# Altium PCB foot_right.PcbDoc
Units mm, origin at the board's own origin, x right, y up, seen from the top; angles counter-clockwise.
Board outline 100 x 65 mm, 2 copper layers (Top Layer, Bottom Layer); 54 components, 39 nets, 212 pads, 0 vias.
Unrouted connection lines stored in the file: 136.
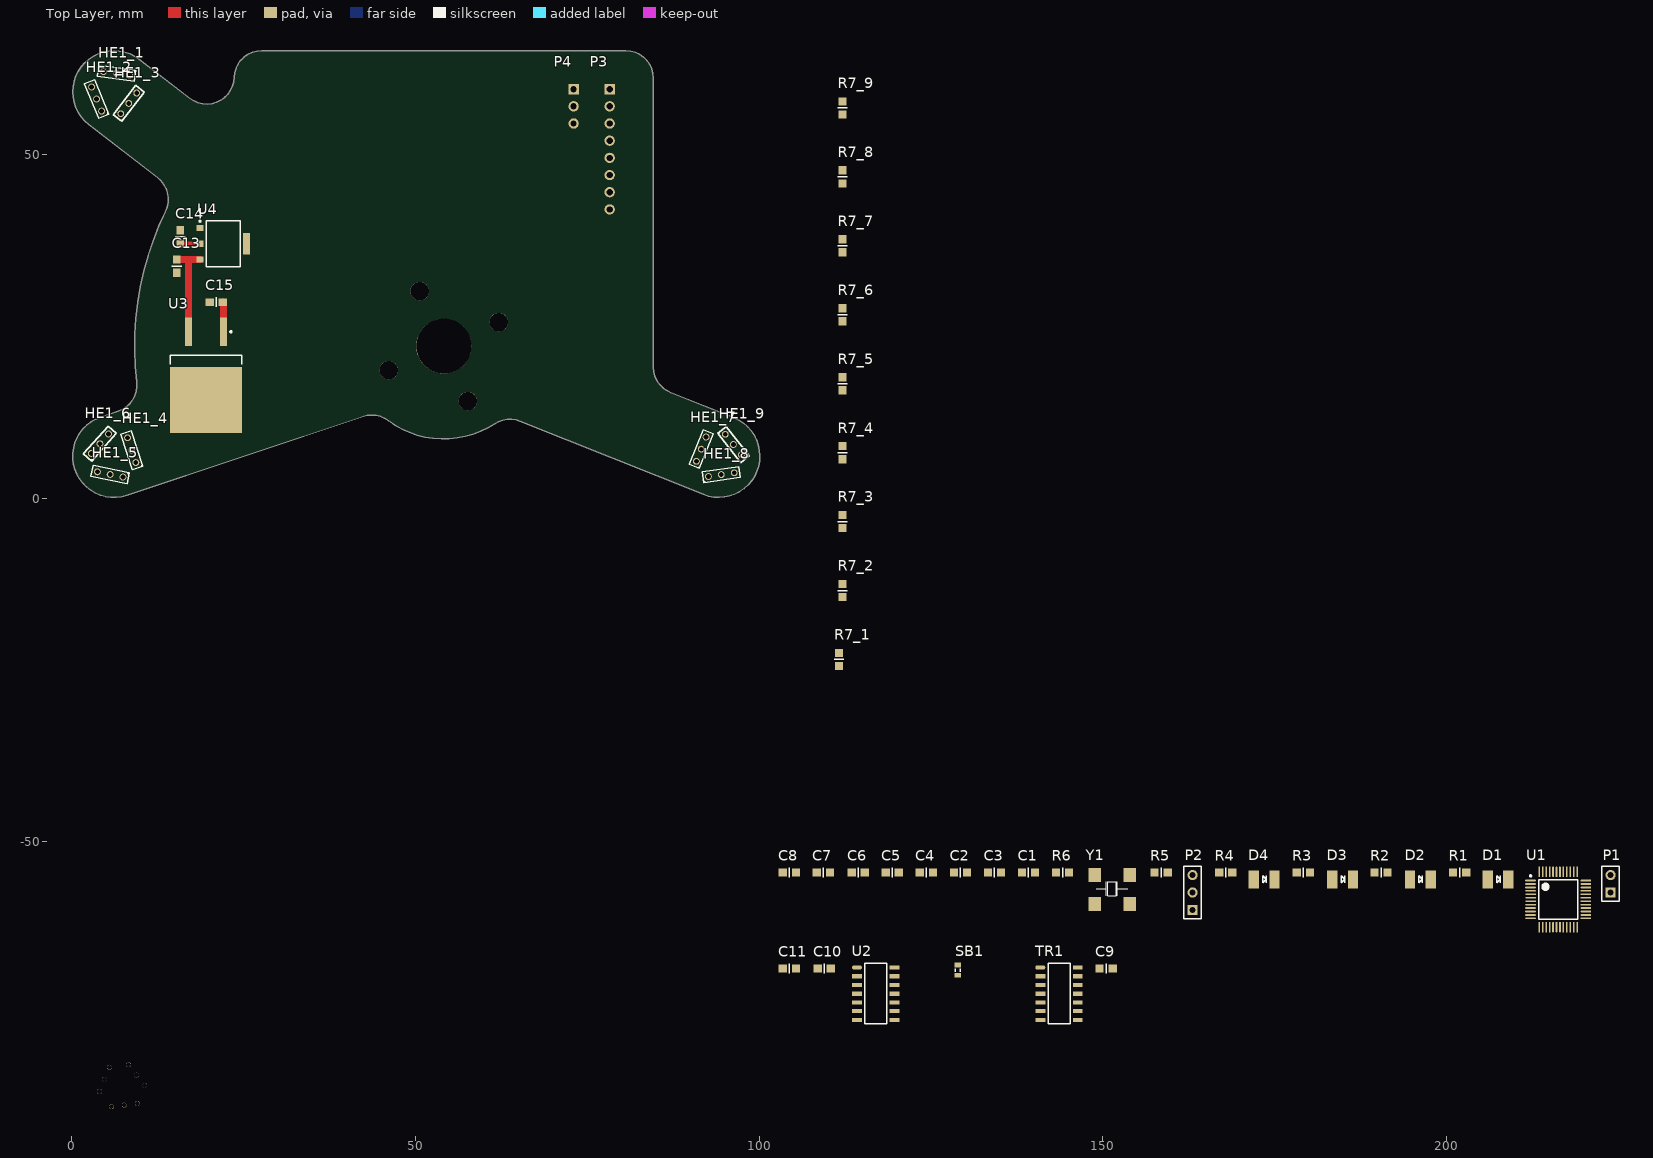
[diagram p0: Top Layer view]
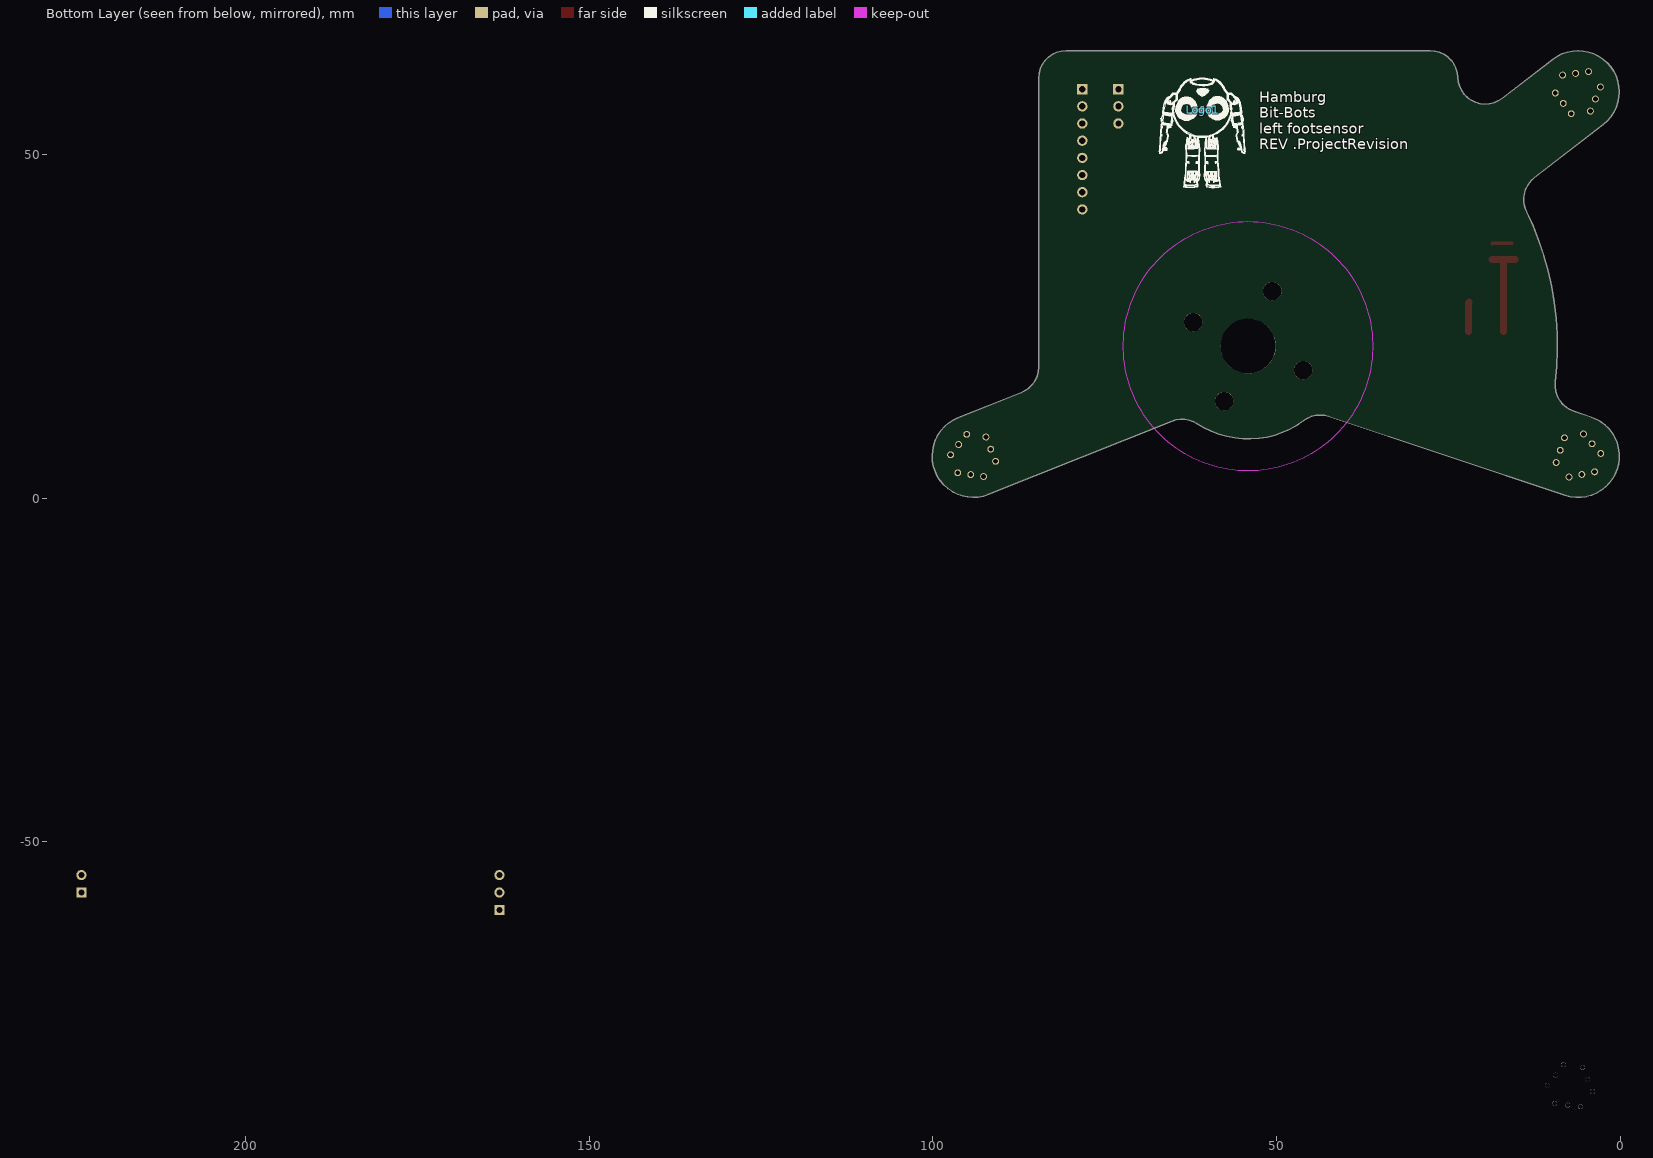
[diagram p1: Bottom Layer view, seen from below]

## Layer stack, top to bottom
Top Solder: solder mask 0.0102, Solder Resist, Dk 3.5
Top Layer: signal copper 0.0356
Dielectric 1: dielectric 0.32, FR-4, Dk 4.8
Bottom Layer: signal copper 0.0356
Bottom Solder: solder mask 0.0102, Solder Resist, Dk 3.5

## Board outline
84.602,61.098 84.541,61.793 84.361,62.466 84.066,63.098 83.666,63.669 83.173,64.162 82.602,64.562 81.97,64.857 81.297,65.037 80.602,65.098 27.599,65.098 26.916,65.039 26.254,64.865 25.631,64.58 25.065,64.193 24.574,63.716 24.172,63.161 23.87,62.546 23.678,61.889 23.6,61.208 23.525,60.536 23.337,59.886 23.043,59.278 22.65,58.728 22.17,58.251 21.617,57.862 21.006,57.572 20.355,57.389 19.683,57.319 19.008,57.362 18.35,57.519 17.728,57.784 17.16,58.15 9.765,63.85 9.113,64.288 8.41,64.636 7.668,64.89 6.898,65.045 6.115,65.098 5.332,65.048 4.562,64.897 3.818,64.646 3.113,64.301 2.46,63.866 1.869,63.35 1.35,62.761 0.912,62.109 0.564,61.406 0.31,60.664 0.155,59.894 0.102,59.111 0.152,58.328 0.303,57.558 0.554,56.814 0.899,56.109 1.334,55.456 1.85,54.865 2.439,54.346 12.447,46.631 12.95,46.17 13.367,45.631 13.686,45.029 13.899,44.381 13.998,43.706 13.981,43.025 13.849,42.356 13.605,41.719 12.647,39.605 11.8,37.444 11.065,35.243 10.444,33.006 9.94,30.741 9.553,28.452 9.285,26.147 9.135,23.831 9.106,21.51 9.196,19.191 9.406,16.88 9.427,16.198 9.332,15.523 9.123,14.874 8.808,14.269 8.394,13.727 7.895,13.263 7.324,12.891 6.697,12.621 4.205,11.79 3.478,11.494 2.796,11.105 2.171,10.631 1.613,10.079 1.132,9.459 0.735,8.781 0.431,8.058 0.224,7.301 0.117,6.523 0.113,5.739 0.211,4.96 0.41,4.201 0.706,3.474 1.095,2.792 1.569,2.167 2.121,1.609 2.741,1.128 3.419,0.731 4.142,0.427 4.899,0.22 5.677,0.113 6.461,0.109 7.24,0.207 7.999,0.406 42.375,11.864 42.997,12.018 43.636,12.07 44.275,12.019 44.898,11.867 45.488,11.617 46.031,11.276 47.006,10.613 48.035,10.038 49.11,9.555 50.223,9.167 51.366,8.878 52.53,8.69 53.705,8.604 54.884,8.621 56.057,8.74 57.215,8.962 58.349,9.283 59.45,9.703 60.511,10.216 61.523,10.821 62.085,11.129 62.689,11.344 63.32,11.459 63.961,11.472 64.596,11.383 65.208,11.193 91.874,0.527 92.62,0.284 93.391,0.14 94.175,0.098 94.958,0.159 95.725,0.322 96.466,0.583 97.165,0.939 97.812,1.383 98.396,1.907 98.906,2.504 99.334,3.162 99.673,3.87 99.916,4.616 100.06,5.387 100.102,6.171 100.041,6.954 99.878,7.721 99.617,8.462 99.261,9.161 98.817,9.808 98.293,10.392 97.696,10.902 97.038,11.33 96.33,11.669 87.116,15.354 86.509,15.659 85.963,16.063 85.492,16.553 85.111,17.115 84.831,17.734 84.66,18.391 84.602,19.068

## Design rules (kind name [scope] priority, off if disabled: settings)
BoardOutlineClearance [All] p1: gap=0.5
Clearance [All] p1: gap=0.2
DiffPairsRouting [All] p1: maxlimit=0.254 minlimit=0.254 mostfreqgap=0.254 toplayer_minwidth=0.381 toplayer_maxwidth=0.381 toplayer_prefwidth=0.381 bottomlayer_minwidth=0.381 bottomlayer_maxwidth=0.381 bottomlayer_prefwidth=0.381 maxuncoupledlength=12.7
PolygonConnect [All] p1: connectstyle=Relief reliefconductorwidth=0.254 reliefentries=4 polygonreliefangle="90 Angle" airgapwidth=0.254
RoomDefinition "Component Keepout" [All] p1: confinementstyle=ConfineOut formatcopy=TRUE lockcomponents=FALSE outline 26.625,35.6 81.625,35.6 81.625,8.6 26.625,8.6
RoutingVias [All] p1: holewidth=0.711 width=1.27 viastyle="Through Hole" minholewidth=0.711 minwidth=1.27 maxholewidth=0.711 maxwidth=1.27 useviatemplates=TRUE
SolderMaskExpansion [All] p1: expansion=0.102
Width [All] p1: maxlimit=5 minlimit=0.15 preferedwidth=0.2
29 further rules are at their usual default settings.

## Classes and differential pairs
component class Connector: C9 C10 C11 IC1 P3 P4 SB1 TR1 U2
component class HallSensorA: HE1_1 R7_1
component class HallSensorB: HE1_2 R7_2
component class HallSensorC: HE1_3 R7_3
component class HallSensorD: HE1_4 R7_4
component class HallSensorE: HE1_5 R7_5
component class HallSensorF: HE1_6 R7_6
component class HallSensorG: HE1_7 R7_7
component class HallSensorH: HE1_8 R7_8
component class HallSensorI: HE1_9 R7_9
component class mainsheet: C1 C2 C3 C4 C5 C6 C7 C8 D1 D2 D3 D4 Logo1 P1 P2 R1 R2 R3 R4 R5 R6 U1 Y1
component class VR: C13 C14 C15 U3 U4
net class OUT[1..9]: OUT1 OUT2 OUT3 OUT4 OUT5 OUT6 OUT7 OUT8 OUT9
channel class A1356: HallSensorA HallSensorB HallSensorC HallSensorD HallSensorE HallSensorF HallSensorG HallSensorH HallSensorI
differential pair DA: +DA_P -DA_N
differential pair DY: +DY_P -DY_N

## Components (designator, comment, footprint, x,y, rotation, side; value= is the part's Value field where it differs from the comment)
C1 "15pF" C2012 139.192,-54.483 r0 top
C2 "100nF" C2012 129.286,-54.483 r0 top
C3 "100nF" C2012 134.239,-54.483 r0 top
C4 "100nF" C2012 124.333,-54.483 r0 top
C5 "100nF" C2012 119.38,-54.483 r0 top
C6 "100nF" C2012 114.427,-54.483 r0 top
C7 "100nF" C2012 109.347,-54.483 r0 top
C8 "100nF" C2012 104.394,-54.483 r0 top
C9 "1uF" C2012 150.495,-68.453 r0 top
C10 "100nF" C2012 109.474,-68.453 r0 top
C11 "1uF" C2012 104.394,-68.453 r0 top
C13 "10uF" C2012 15.25,33.75 r90 top
C14 "10uF" C2012 15.75,38 r270 top
C15 "1uF" C2012 21,28.5 r180 top
D1 "Green" MLCC2 207.518,-55.499 r0 top
D2 "Green" MLCC2 196.215,-55.499 r0 top
D3 "Green" MLCC2 184.912,-55.499 r0 top
D4 "Green" MLCC2 173.482,-55.499 r0 top
HE1_1 "A1356" "3-Pin SIP" 8.347,61.546 r172.38 top locked (schematic designator HE1)
HE1_2 "A1356" "3-Pin SIP" 4.306,56.304 r112.37 top locked (schematic designator HE1)
HE1_3 "A1356" "3-Pin SIP" 7.1,55.93 r52.38 top locked (schematic designator HE1)
HE1_4 "A1356" "3-Pin SIP" 9.29,5.158 r108.48 top locked (schematic designator HE1)
HE1_5 "A1356" "3-Pin SIP" 7.417,3.048 r168.43 top locked (schematic designator HE1)
HE1_6 "A1356" "3-Pin SIP" 2.804,6.483 r48.45 top locked (schematic designator HE1)
HE1_7 "A1356" "3-Pin SIP" 90.867,5.346 r68.19 top locked (schematic designator HE1)
HE1_8 "A1356" "3-Pin SIP" 92.61,3.131 r8.2 top locked (schematic designator HE1)
HE1_9 "A1356" "3-Pin SIP" 95.068,9.275 r308.21 top locked (schematic designator HE1)
Logo1 "Hamburg Bit-Bots Logo" Logo 60.75,56.5 r180 bottom
P1 "Programming" HDR1X2 223.901,-57.404 r90 top
P2 "Boot0" HDR1X3 163.068,-59.944 r90 top
P3 "RS-485" 8-Pin 78.25,59.5 r270 top
P4 "TTL" 3-Pin 73,59.5 r270 top
R1 "1k" R2012 201.93,-54.483 r0 top
R2 "1k" R2012 190.5,-54.483 r0 top
R3 "1k" R2012 179.197,-54.483 r0 top
R4 "1k" R2012 167.894,-54.483 r0 top
R5 "4k7" R2012 158.496,-54.483 r0 top
R6 "4k7" R2012 144.145,-54.483 r0 top
R7_1 "4k7" R2012 111.633,-23.495 r90 top (schematic designator R7)
R7_2 "4k7" R2012 112.141,-13.462 r90 top (schematic designator R7)
R7_3 "4k7" R2012 112.141,-3.429 r90 top (schematic designator R7)
R7_4 "4k7" R2012 112.141,6.604 r90 top (schematic designator R7)
R7_5 "4k7" R2012 112.141,16.637 r90 top (schematic designator R7)
R7_6 "4k7" R2012 112.141,26.67 r90 top (schematic designator R7)
R7_7 "4k7" R2012 112.141,36.703 r90 top (schematic designator R7)
R7_8 "4k7" R2012 112.141,46.736 r90 top (schematic designator R7)
R7_9 "4k7" R2012 112.141,56.769 r90 top (schematic designator R7)
SB1 "Solder Bridge" J1-0603 128.905,-68.707 r90 top
TR1 "MAX3079" SOIC14 143.637,-72.136 r0 top
U1 "STM32F100C8T6BTR" STM-LQFP48_L 216.281,-58.42 r0 top
U2 "74HC126" SOIC14 116.967,-72.136 r0 top
U3 "L7805CD2T-TR" TO-263_M 19.5,17.85 r270 top
U4 "NCP1117ST33T3G" ONSC-SOT-223_L 22,37 r0 top
Y1 "FXO-HC736R-16" FXO-HC73 148.844,-54.864 r0 top

## Footprints (in the part's own frame and the unit in brackets; to place one, negate y for a bottom-side part, rotate by r counter-clockwise, add the part's x,y. Pads: shape width x height; smd on the part's side, far side on the other; paste and mask are expansions set on the pad)
3-Pin [mm] "2.5mm pitch"
  rect 1.5x1.5 hole 0.9: 1(0,0)
  round 1.5 hole 0.9: 2(2.5,0) 3(5,0)
  body extent -2.45,-3.07 7.45,1.83, height 5.95
"3-Pin SIP" [mm]
  round 1 hole 0.7: 1(0,0) 2(1.9,0) 3(3.8,0)
  silkscreen extent -0.8,-0.8 4.6,0.8
8-Pin [mm] "2.5mm pitch"
  rect 1.5x1.5 hole 0.9: 1(0,0)
  round 1.5 hole 0.9: 2(2.5,0) 3(5,0) 4(7.5,0) 5(10,0) 6(12.5,0) 7(15,0) 8(17.5,0)
  body extent -2.45,-3.1 19.95,1.8, height 5.95
C2012 [mm]
  rect 1.2x1.14 smd: 1(-0.95,0) 2(0.95,0)
  silkscreen extent 0,-0.7 0,0.7, body extent -1,-0.62 1,0.63, height 0.78
FXO-HC73 [mm]
  rect 1.8x2 smd: 1(0,0) 2(5.08,0) 3(5.08,-4.2) 4(0,-4.2)
  silkscreen extent 0.2,-3 4.8,-1, body extent -1.3,-4.71 6.2,0.51, height 1.41
HDR1X2 [mm] "Connector; Header; 2 Position"
  rect 1.5x1.5 hole 0.9: 1(0,0)
  round 1.5 hole 0.9: 2(2.54,0)
  silkscreen extent -1.27,-1.27 3.81,1.27
HDR1X3 [mm] "Connector; Header; 3 Position"
  rect 1.5x1.5 hole 0.9: 1(0,0)
  round 1.5 hole 0.9: 2(2.54,0) 3(5.08,0)
  silkscreen extent -1.27,-1.27 6.35,1.27
J1-0603 [mm] "Chip Resistor, Body 1.6x0.8mm, IPC High Density"
  rect 0.7x0.9 smd: 1(-0.75,0) 2(0.75,0)
  silkscreen extent -0.2,-0.35 0.2,0.35, body extent -0.85,-0.48 0.85,0.48, height 0.9
Logo [mm] "Logo of Hamburg Bit-Bots"
  silkscreen extent -6.31,-11.39 6.2,4.6
MLCC2 [mm]
  rect 1.5x2.6 smd: 1(-1.5,0) 2(1.5,0)
  silkscreen extent -0.2,-0.5 0.3,0.5, body extent -1.75,-1.4 1.75,1.4, height 1.7
ONSC-SOT-223_L [mm] "SOT223, 4-Leads, Body 3.7x6.7mm, Pitch 2.3mm, IPC High Density"
  rect 1.05x0.9 smd: 1(-3.375,2.3) 2(-3.375,0) 3(-3.375,-2.3)
  rect 1.05x3.1 smd: 4(3.375,0)
  silkscreen extent -3.5,-3.35 2.45,3.42, body extent -1.85,-3.35 1.85,3.35, height 1.8
R2012 [mm]
  rect 1.2x1.14 smd: 1(-0.95,0) 2(0.95,0)
  silkscreen extent 0,-0.7 0,0.7, body extent -1,-0.62 1,0.63, height 0.78
SOIC14 [mm] "SOIC, 14-Leads, Body 8,65x3,90mm, Pitch 1,27mm, IPC Medium Density"
  oval 1.45x0.6 smd: 1(-2.725,3.81)
  rect 1.45x0.6 smd: 2(-2.725,2.54) 3(-2.725,1.27) 4(-2.725,0) 5(-2.725,-1.27) 6(-2.725,-2.54) 7(-2.725,-3.81) 8(2.725,-3.81) 9(2.725,-2.54) 10(2.725,-1.27) 11(2.725,0) 12(2.725,1.27) 13(2.725,2.54) 14(2.725,3.81)
  silkscreen extent -1.6,-4.4 1.6,4.4, body extent -2.9,-4.37 3.1,4.37, height 1.75
STM-LQFP48_L [mm] "QFP, 48-Leads, Body 7x7mm, Pitch 0.5mm, IPC High Density"
  oval 1.55x0.25 smd: 1(-4.025,2.75) 2(-4.025,2.25) 3(-4.025,1.75) 4(-4.025,1.25) 5(-4.025,0.75) 6(-4.025,0.25) 7(-4.025,-0.25) 8(-4.025,-0.75) 9(-4.025,-1.25) 10(-4.025,-1.75) 11(-4.025,-2.25) 12(-4.025,-2.75) 25(4.025,-2.75) 26(4.025,-2.25) 27(4.025,-1.75) 28(4.025,-1.25) 29(4.025,-0.75) 30(4.025,-0.25) 31(4.025,0.25) 32(4.025,0.75) 33(4.025,1.25) 34(4.025,1.75) 35(4.025,2.25) 36(4.025,2.75)
  oval 0.25x1.55 smd: 13(-2.75,-4.025) 14(-2.25,-4.025) 15(-1.75,-4.025) 16(-1.25,-4.025) 17(-0.75,-4.025) 18(-0.25,-4.025) 19(0.25,-4.025) 20(0.75,-4.025) 21(1.25,-4.025) 22(1.75,-4.025) 23(2.25,-4.025) 24(2.75,-4.025) 37(2.75,4.025) 38(2.25,4.025) 39(1.75,4.025) 40(1.25,4.025) 41(0.75,4.025) 42(0.25,4.025) 43(-0.25,4.025) 44(-0.75,4.025) 45(-1.25,4.025) 46(-1.75,4.025) 47(-2.25,4.025) 48(-2.75,4.025)
  silkscreen extent -4.15,-2.85 2.85,3.55, body extent -3.5,-3.5 3.5,3.5, height 1.6
TO-263_M [mm] "D2-PAK, 4-Leads, Body 9.2x10.2mm, Pitch 2.54mm, Lead Span 15.4mm, IPC Low Density"
  rect 4.1x1.05 smd: 1(-6.35,2.54) 3(-6.35,-2.54)
  rect 9.6x10.45 smd: 4(3.6,0)
  silkscreen extent -6.47,-5.2 -1.6,5.2, body extent -2.9,-5.2 6.45,5.2, height 4.6

## Part data
C1 C2 C3 C4 C5 C6 C7 C8 C10 C11 C13 C14 C15: library part Cap, "Capacitor"
C9: library part "Cap Semi", "Capacitor"
D1 D2 D3 D4: library part LED0, "Typical INFRARED GaAs LED"
HE1_1 HE1_2 HE1_3 HE1_4 HE1_5 HE1_6 HE1_7 HE1_8 HE1_9: "Linear Hall-Effect Sensor"
Logo1: library part Logo
P1: library part "Header 2", "Header, 2-Pin"
P2 P4: library part "Header 3", "Header, 3-Pin"
P3: library part "Header 8", "Header, 8-Pin"
R1 R2 R3 R4 R5 R6 R7_1 R7_2 R7_3 R7_4 R7_5 R7_6 R7_7 R7_8 R7_9: library part Res2, "Resistor"
SB1: library part Res3, "Resistor"
TR1: "MAX3079 RS485-Transreceiver"
U1: library part CMP-0237-00141-3, "ARM Cortex-M3 32-bit MCU, 64 KB Flash, 8 KB Internal RAM, 37 I/Os, 48-pin LQFP, -40 to 85 degC, Tape and Reel"
U2: "Quad 3-State Noninverting Buffer"
U3: library part CMP-0244-00213-1, "Positive Voltage Regulator, 3-Pin D2PAK, Tape and Reel"
U4: library part CMP-0592-00001-2, "1.0 A Low-Dropout Positive Fixed Voltage Regulator, 5 V Vout, 0 to 125 degC, 4-Pin SOT-223, Pb-Free, Tape and Reel"
Y1: library part Oszillator, "Oscillator with Enable Input"

## Free pads (board coordinates)
  round 0.7 hole 0.7: 1(4.003,-86.361) 1(4.726,-84.604) 1(5.449,-82.847) 1(5.723,-88.593) 1(7.607,-88.341) 1(8.242,-82.473) 1(9.402,-83.978) 1(9.49,-88.089) 1(10.562,-85.483)
  round 2.7 hole 2.7 unplated: 1(46.102,18.598) 1(50.602,30.098) 1(57.602,14.098) 1(62.102,25.598)
  round 8 hole 8 unplated: 1(54.102,22.098)

## Nets (pads, with @x,y where several pads share a name; then routed paths per layer and width w, separated by ;. In a path a pad name is that pad's centre, name@x,y a point inside that pad or via, vN(x,y) a via of type N, cw(c..) or ccw(c..) an arc to the next point about the centre after c; other vN are vias at no path point)
+3V3: C2.1 C4.2 C5.2 C6.2 C7.2 C8.2 C9.1 C14.2 D1.1 D2.1 D3.1 D4.1 P2.1 P3.6 R6.2 R7_1.2 R7_2.2 R7_3.2 R7_4.2 R7_5.2 R7_6.2 R7_7.2 R7_8.2 R7_9.2 SB1.2 TR1.14 U1.1 U1.9 U1.24 U1.36 U1.48 U4.2 Y1.4 | length 2.9
  Top Layer w0.5: C14.2 18.575,37.05 U4.2
+5V: C10.2 C11.1 C13.2 HE1_1.1 HE1_2.1 HE1_3.1 HE1_4.1 HE1_5.1 HE1_6.1 HE1_7.1 HE1_8.1 HE1_9.1 P3.5 U2.14 U3.3 U4.3 | length 15.4
  Top Layer w1: C13.2 U4.3 17.2,34.7 16.96,34.46 U3.3
+12V: C15.1 P3.2 P4.2 U3.1 | length 4.3
  Top Layer w1: C15.1 22.04,28.41 U3.1
\RST: C3.2 R6.1 U1.7
BOOT0: R5.1 U1.44
DA_N: P3.4 TR1.11
DA_P: P3.3 TR1.12
DY_N: P3.7 TR1.9
DY_P: P3.8 TR1.10
GND: C1.1 C2.2 C3.1 C4.1 C5.1 C6.1 C7.1 C8.1 C9.2 C10.1 C11.2 C13.1 C14.1 C15.2 HE1_1.2 HE1_2.2 HE1_3.2 HE1_4.2 HE1_5.2 HE1_6.2 HE1_7.2 HE1_8.2 HE1_9.2 P2.3 P3.1 P4.1 TR1.7 TR1.8 TR1.13 U1.8 U1.23 U1.35 U1.47 U2.7 U2.12 U2.13 U3.4 U4.1 U4.4 Y1.2
NetC1_2: C1.2 U1.5 Y1.3
NetD1_2: D1.2 R1.2
NetD2_2: D2.2 R2.2
NetD3_2: D3.2 R3.2
NetD4_2: D4.2 R4.2
NetIC1_4: U2.4
NetP2_2: P2.2 R5.2
NetR1_1: R1.1 U1.34
NetR2_1: R2.1 U1.33
NetR3_1: R3.1 U1.37
NetR4_1: R4.1 U1.38
NetSB1_1: SB1.1 TR1.1
OUT1: HE1_1.3 R7_1.1 U1.29
OUT2: HE1_2.3 P1.1 R7_2.1 U1.30
OUT3: HE1_3.3 P1.2 R7_3.1 U1.31
OUT4: HE1_4.3 R7_4.1 U1.16
OUT5: HE1_5.3 R7_5.1 U1.17
OUT6: HE1_6.3 R7_6.1 U1.18
OUT7: HE1_7.3 R7_7.1 U1.32
OUT8: HE1_8.3 R7_8.1 U1.19
OUT9: HE1_9.3 R7_9.1 U1.42
SRL: TR1.6 U2.8
TRI1.A: U1.28 U2.9
TRI1.OE: U1.27 U2.10
TTL_BRIDGE.\RE: TR1.3 U1.26
TTL_BRIDGE.DE: TR1.4 U1.25 U2.1
TTL_BRIDGE.RX: TR1.2 U1.22 U2.6
TTL_BRIDGE.TX: TR1.5 U1.21 U2.2
TTL_DATA: P4.3 U2.3 U2.5
pads on no net: U1.2 U1.3 U1.4 U1.6 U1.10 U1.11 U1.12 U1.13 U1.14 U1.15 U1.20 U1.39 U1.40 U1.41 U1.43 U1.45 U1.46 U2.11 Y1.1

## Keep-outs
Bottom Layer:
  region: 54.137,40.246 ccw(c54.137,22.095) 54.137,3.944 ccw(c54.137,22.095)

## Silkscreen, mask and mechanical layers (free items; w line width, h text height)
Bottom Overlay:
  text "Hamburg / Bit-Bots / left footsensor / REV .ProjectRevision" at 52.5,50.75 h1.52